# Altium PCB PCB1.PcbDoc
Units mil, origin at the board's own origin, x right, y up, seen from the top; angles counter-clockwise.
Board outline 800 x 1400 mil, 2 copper layers (Top Layer, Bottom Layer); 4 components, 8 nets, 47 pads, 1 vias.
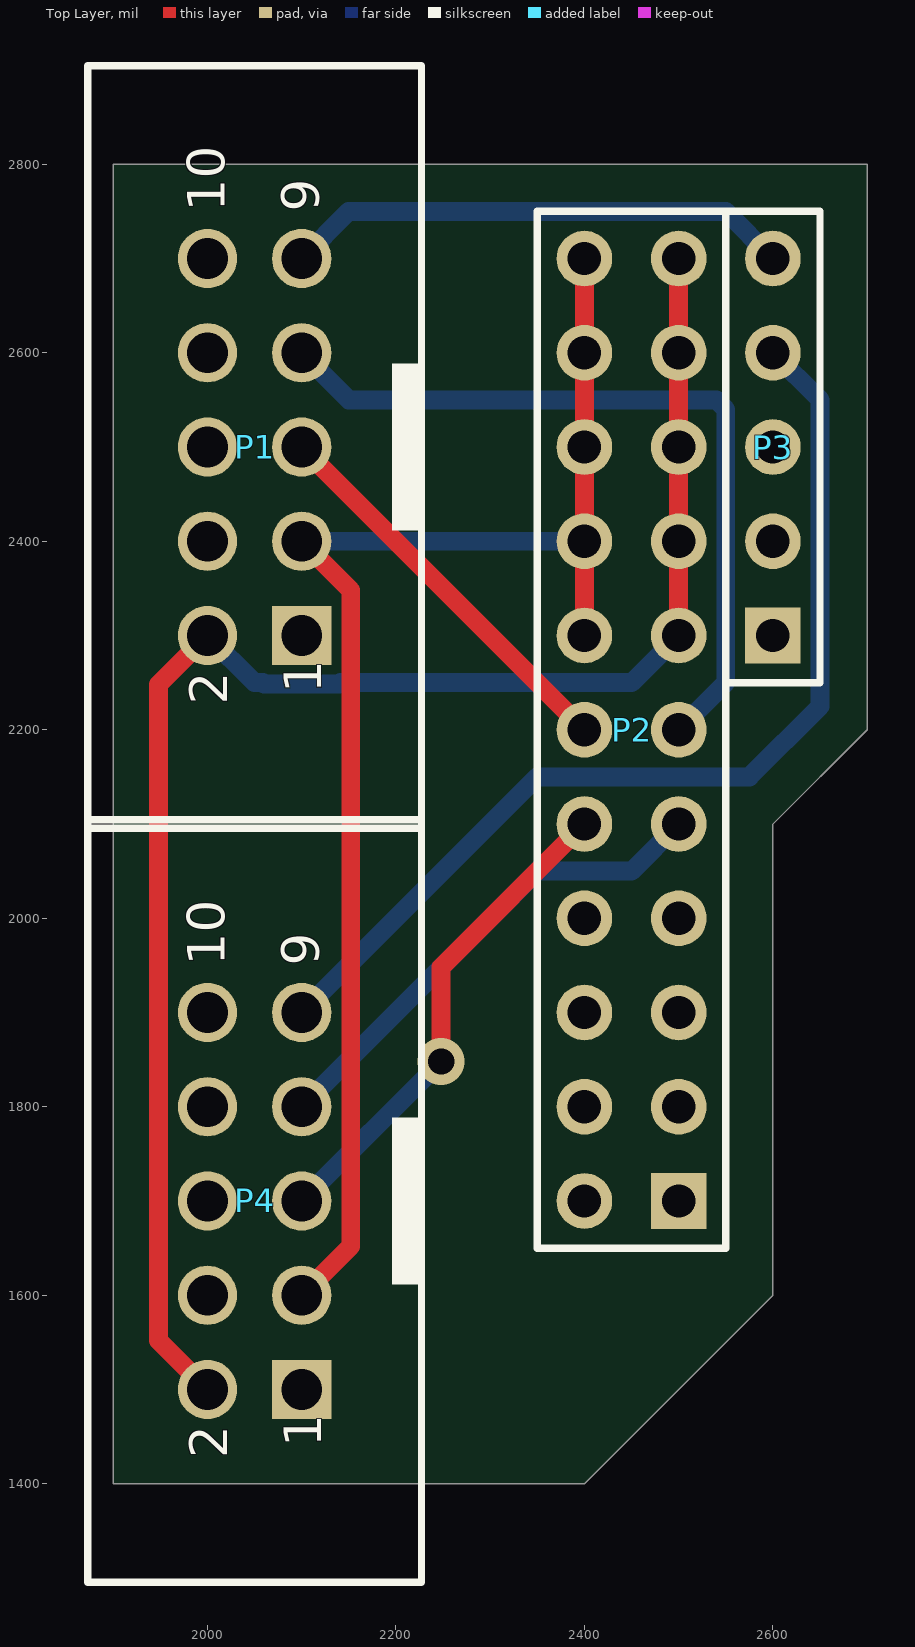
[diagram p0: Top Layer view]
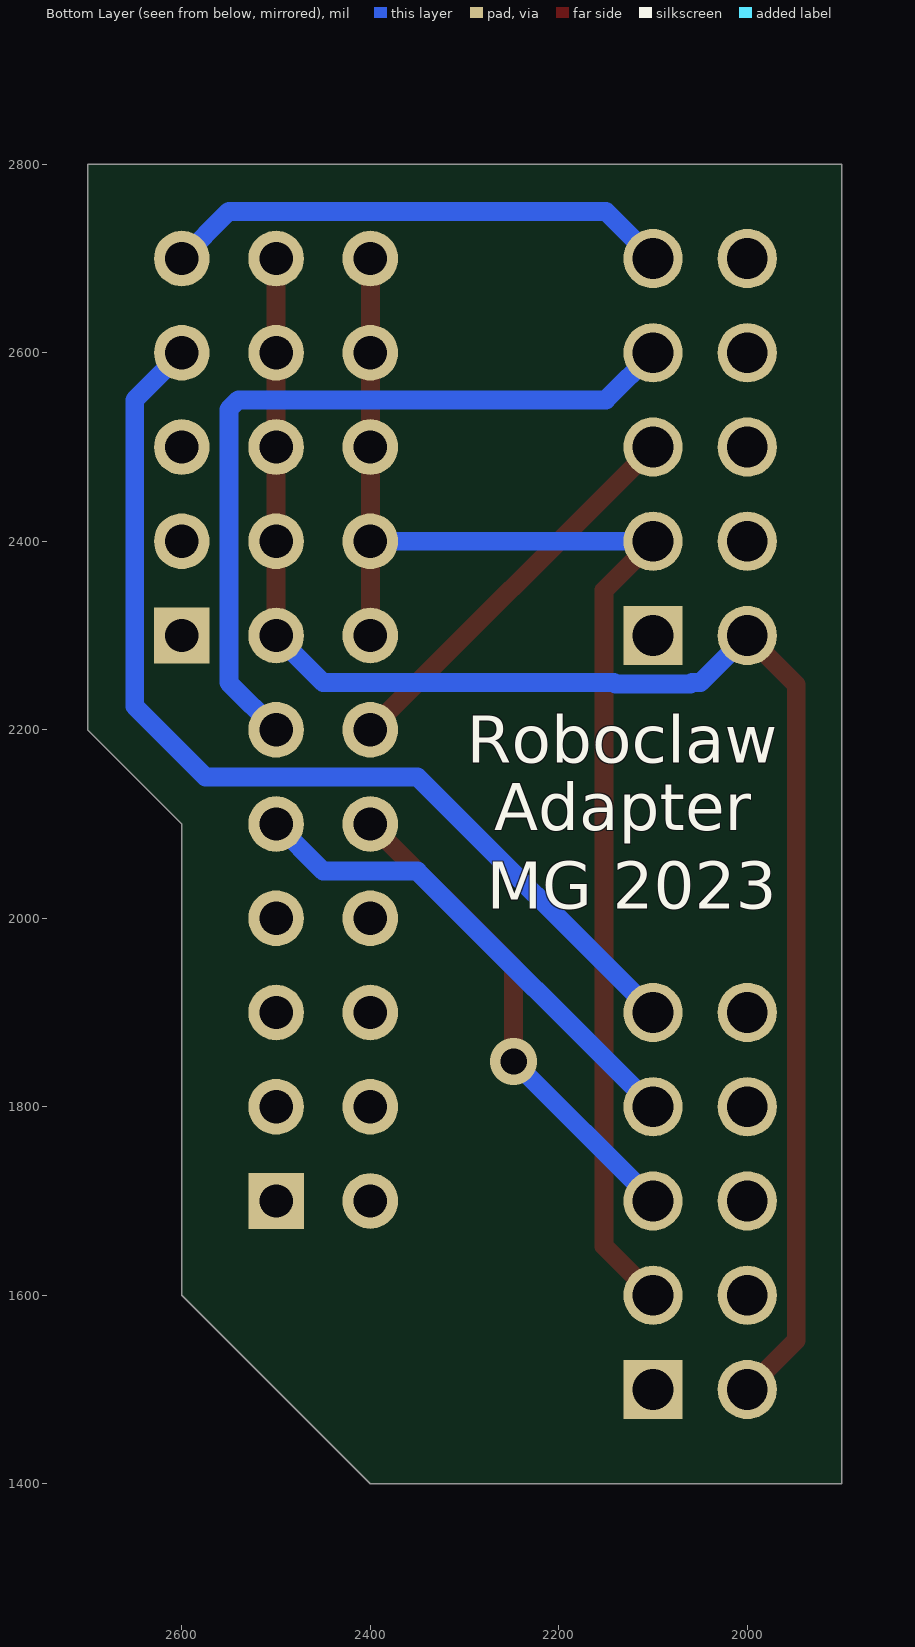
[diagram p1: Bottom Layer view, seen from below]

## Layer stack, top to bottom
Top Solder: solder mask 0.4, Solder Resist, Dk 3.5
Top Layer: signal copper 1.4
Dielectric 1: dielectric 12.6, FR-4, Dk 4.8
Bottom Layer: signal copper 1.4
Bottom Solder: solder mask 0.4, Solder Resist, Dk 3.5

## Board outline
1900,1400 1900,2800 2700,2800 2700,2200 2600,2100 2600,1600 2400,1400

## Design rules (kind name [scope] priority, off if disabled: settings)
Clearance [All] p1: gap=10 ignorepadtopadclearanceinfootprint=FALSE except(0: Arc-Hole Track-Hole SMDPad-Hole THPad-Hole Via-Hole Fill-Hole Poly-Hole Region-Hole Text-Hole)
PolygonConnect [All] p1: connectstyle=Relief reliefconductorwidth=10 reliefentries=4 polygonreliefangle="90 Angle" airgapwidth=10
RoutingVias [All] p1: holewidth=28 width=50 viastyle="Through Hole" minholewidth=28 minwidth=50 maxholewidth=28 maxwidth=50
SolderMaskExpansion [All] p1: expansion=4 istentingtop=FALSE
Width [All] p1: maxlimit=20 minlimit=10 preferedwidth=20 minimp=50.000000 maximp=50.000000 favimp=50.000000
30 further rules are at their usual default settings.

## Components (designator, comment, footprint, x,y, rotation, side; value= is the part's Value field where it differs from the comment)
P1 "61201021621" 61201021621 2050,2500 r90 top
P2 "Header 11X2" HDR2X11 2500,1700 r90 top
P3 "Header 5" HDR1X5 2600,2300 r90 top
P4 "61201021621" 61201021621 2050,1700 r90 top

## Footprints (in the part's own frame and the unit in brackets; to place one, negate y for a bottom-side part, rotate by r counter-clockwise, add the part's x,y. Pads: shape width x height; smd on the part's side, far side on the other; paste and mask are expansions set on the pad)
61201021621 [mm] "10 pins, straight, gold plating"
  rect 1.6x1.6 hole 1.1: 1(-5.08,-1.27)
  round 1.6 hole 1.1: 2(-5.08,1.27) 3(-2.54,-1.27) 4(-2.54,1.27) 5(0,-1.27) 6(0,1.27) 7(2.54,-1.27) 8(2.54,1.27) 9(5.08,-1.27) 10(5.08,1.27)
  silkscreen extent -10.28,-4.5 10.28,4.5, body extent -10.18,-4.42 10.18,4.75, height 9.13
HDR1X5 [mm] "Connector; Header; 5 Position"
  rect 1.5x1.5 hole 0.9: 1(0,0)
  round 1.5 hole 0.9: 2(2.54,0) 3(5.08,0) 4(7.62,0) 5(10.16,0)
  silkscreen extent -1.27,-1.27 11.43,1.27
HDR2X11 [mm] "Connector; Header; 11x2 Position"
  rect 1.5x1.5 hole 0.9: 1(0,0)
  round 1.5 hole 0.9: 2(0,2.54) 3(2.54,0) 4(2.54,2.54) 5(5.08,0) 6(5.08,2.54) 7(7.62,0) 8(7.62,2.54) 9(10.16,0) 10(10.16,2.54) 11(12.7,0) 12(12.7,2.54) 13(15.24,0) 14(15.24,2.54) 15(17.78,0) 16(17.78,2.54) 17(20.32,0) 18(20.32,2.54) 19(22.86,0) 20(22.86,2.54) 21(25.4,0) 22(25.4,2.54)
  silkscreen extent -1.27,-1.27 26.67,3.81

## Part data
P1 P4: library part CMP-1502-00007-1, "Male Box Header WR-BHD, THT, Vertical, pitch 2.54 mm, 10 pins", Contact Resistance=20mOhm, Manufacturer="Wurth Elektronik", Operating Temperature=-40to125degC, Withstanding Voltage=500VAC, Working Voltage=250VAC, Datasheet URL=https://katalog.we-online.de/em/datasheet/6120xx21621.pdf, Gender=Male, Manufacturer URL=http://www.we-online.de, Mounting Technology=THT, Orientation=Vertical, Package Reference=61201021621, Packaging=Tray, Part Number=61201021621, Pin Number=10, Pitch=2.54mm, Published Date=August2018, Publisher=WurthElektronik
P2: "Header, 11-Pin, Dual row", LatestRevisionDate=17-Jul-2002, LatestRevisionNote="Re-released for DXP Platform.", Publisher="Altium Limited"
P3: "Header, 5-Pin", LatestRevisionDate=17-Jul-2002, LatestRevisionNote="Re-released for DXP Platform.", Publisher="Altium Limited"

## Via types
v1: diameter 50, hole 28, Top Layer to Bottom Layer, 1 vias

## Nets (pads, with @x,y where several pads share a name; then routed paths per layer and width w, separated by ;. In a path a pad name is that pad's centre, name@x,y a point inside that pad or via, vN(x,y) a via of type N, cw(c..) or ccw(c..) an arc to the next point about the centre after c; other vN are vias at no path point)
NetP1_2: P1.2 P2.13 P2.15 P2.17 P2.19 P2.21 P4.2 | length 1785.7
  Top Layer w20: P4.2 1948,1552 1948,2248 P1.2 ; P2.13 P2.15 P2.17 P2.19 P2.21
  Bottom Layer w20: P1.2 2050,2250 2058.72,2250 2060.22,2248.5 2139.78,2248.5 2141.28,2250 2450,2250 P2.13
NetP1_3: P1.3 P2.14 P2.16 P2.18 P2.20 P2.22 P4.3 | length 1543.1
  Top Layer w20: P4.3 2152,1652 2152,2348 P1.3 ; P2.14 P2.16 P2.18 P2.20 P2.22
  Bottom Layer w20: P1.3 P2.16
NetP1_5: P1.5 P2.12 | length 424.3
  Top Layer w20: P1.5 P2.12
NetP1_7: P1.7 P2.11 | length 835.6
  Bottom Layer w20: P1.7 2150,2550 2540,2550 2550,2540 2550,2250 P2.11
NetP1_9: P1.9 P3.5 | length 541.4
  Bottom Layer w20: P1.9 2150,2750 2550,2750 P3.5
NetP2_9: P2.9 P4.7 | length 524.3
  Bottom Layer w20: P4.7 2350,2050 2450,2050 P2.9
NetP2_10: P2.10 P4.5 | length 524.3
  Top Layer w20: v1(2248,1848) 2248,1948 P2.10
  Bottom Layer w20: P4.5 v1(2248,1848)
NetP3_4: P3.4 P4.9 | length 1080.3
  Bottom Layer w20: P4.9 2350,2150 2575,2150 2650,2225 2650,2550 P3.4
pads on no net: P1.1 P1.4 P1.6 P1.8 P1.10 P2.1 P2.2 P2.3 P2.4 P2.5 P2.6 P2.7 P2.8 P3.1 P3.2 P3.3 P4.1 P4.4 P4.6 P4.8 P4.10

## Silkscreen, mask and mechanical layers (free items; w line width, h text height)
Bottom Overlay:
  text "Roboclaw" at 2297.44,2165.01 h50
  text "Adapter" at 2268.28,2093.34 h50
  text "MG 2023" at 2276.61,2010.01 h50
Mechanical 1:
  the board outline again, w7.87

## Text inside footprints (layer, text, board x,y; h text height)
P1: Top Overlay "9" at 2118.5,2749.61 h40 r90; Top Overlay "10" at 2018.5,2749.61 h40 r90; Top Overlay "2" at 2020.87,2226.77 h40 r90; Top Overlay "1" at 2120.87,2238.58 h40 r90
P4: Top Overlay "9" at 2118.5,1949.61 h40 r90; Top Overlay "10" at 2018.5,1949.61 h40 r90; Top Overlay "2" at 2020.87,1426.77 h40 r90; Top Overlay "1" at 2120.87,1438.58 h40 r90